# EAGLE board Proto_shield_REV3 (EAGLE 7.4.0)
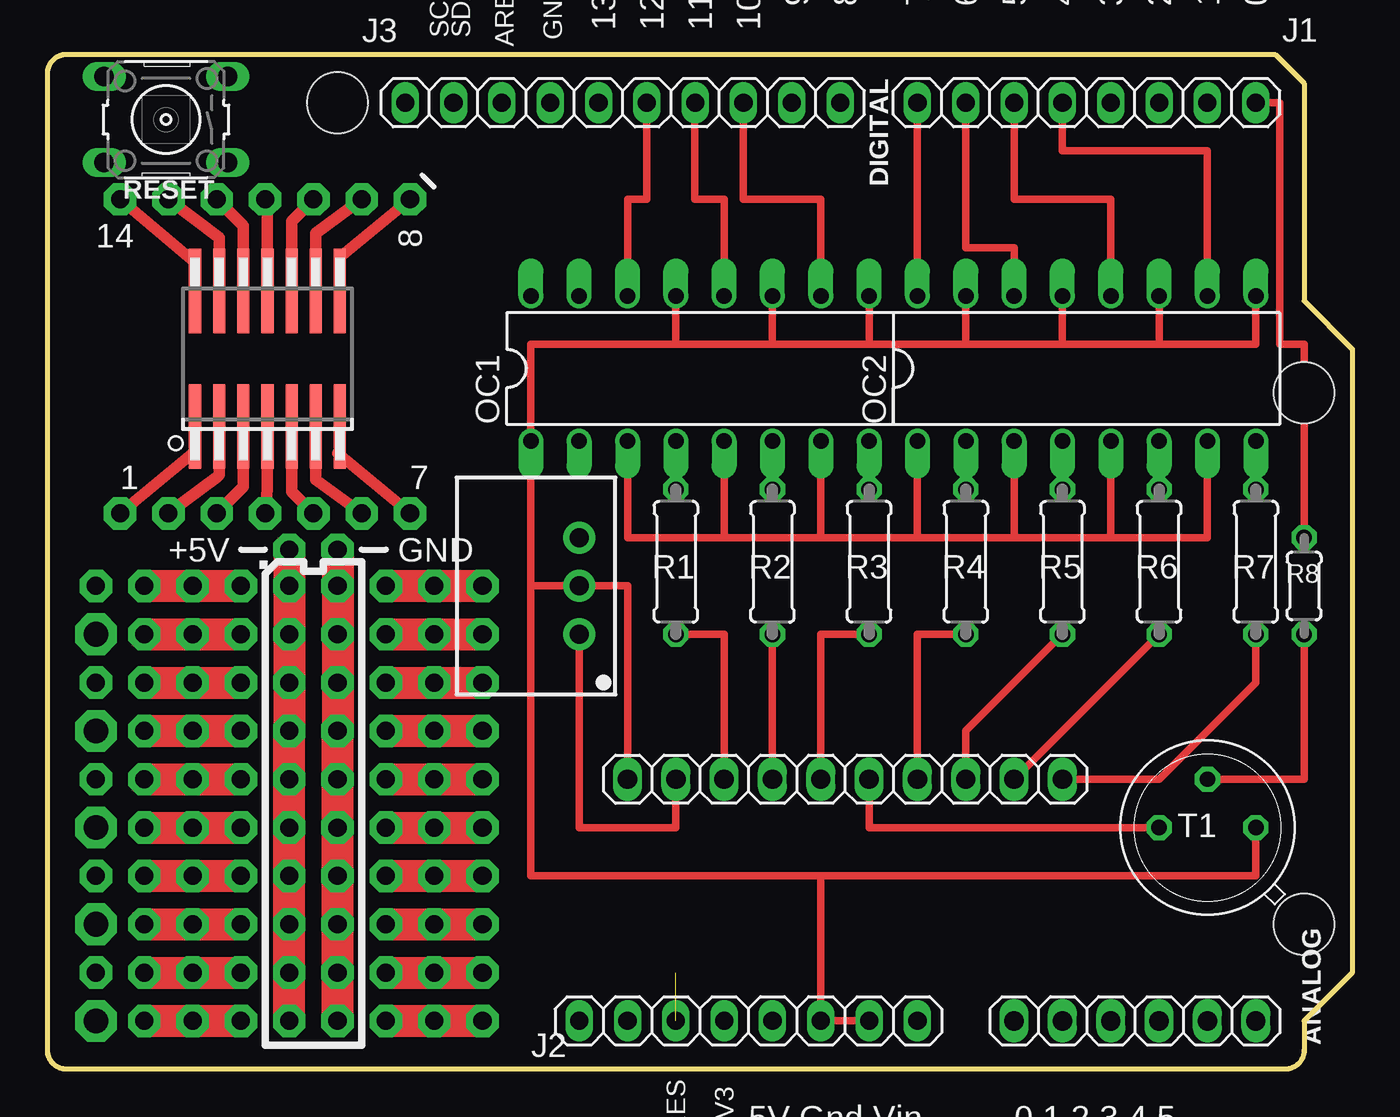
[diagram p0: board, top side]
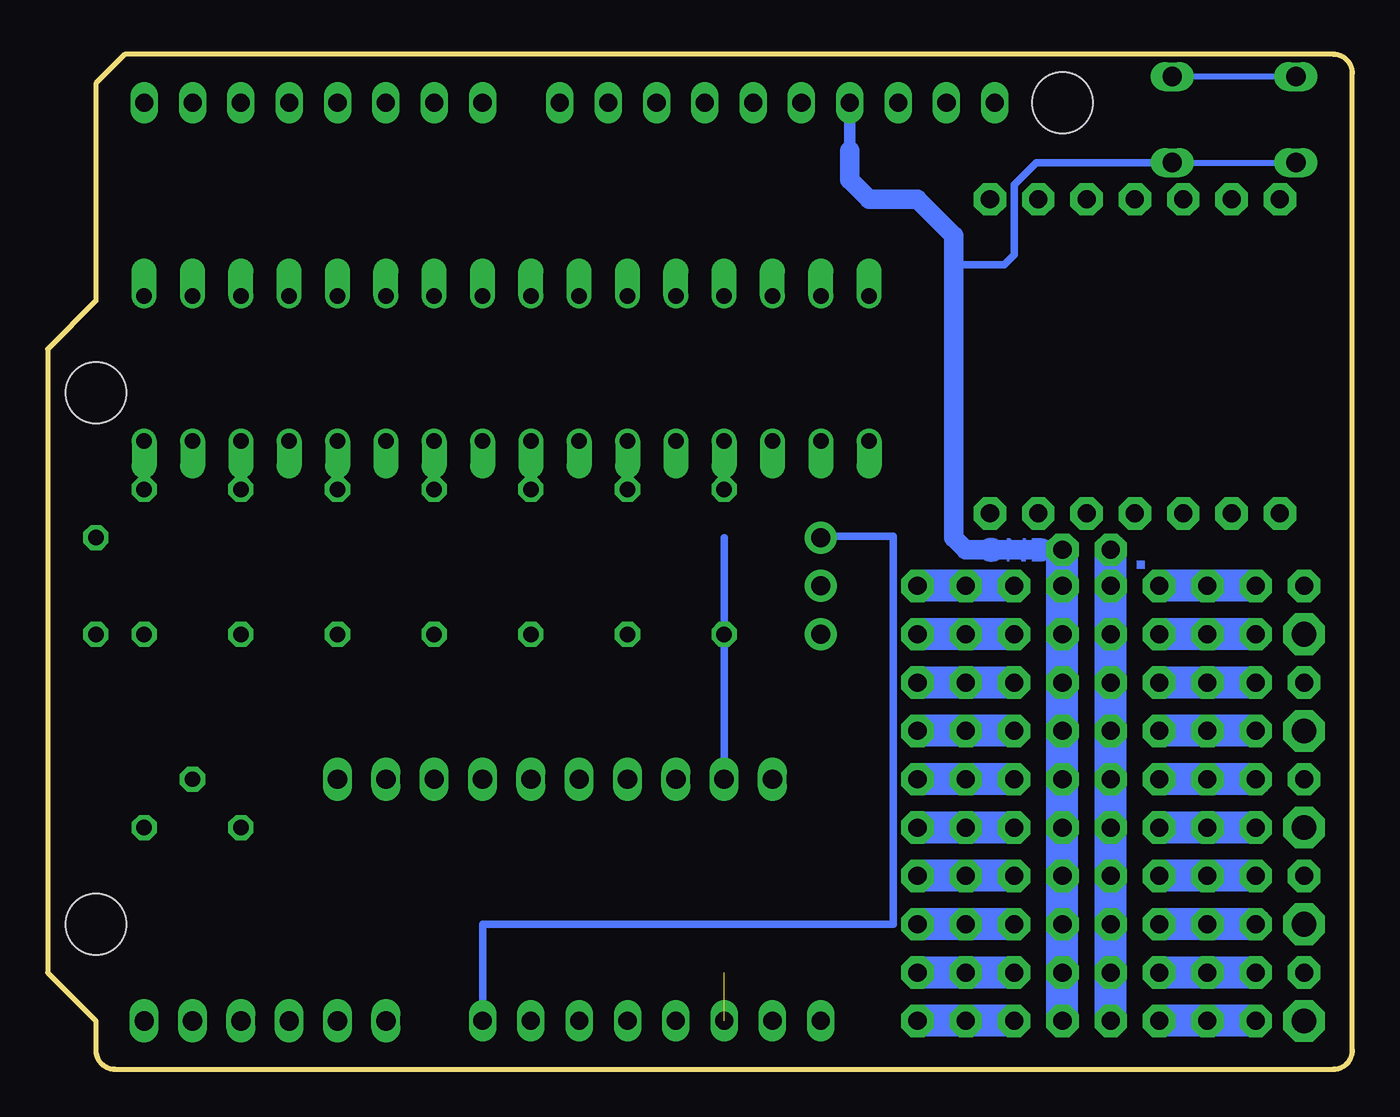
[diagram p1: board, bottom side, seen from below]

Size 68.58 x 53.34 mm. Coordinates in mm from the lower left corner, seen from the top.
Outline: 64.52,53.34 66.04,51.82 66.04,40.39 68.58,37.85 68.58,5.08 66.04,2.54 66.04,1 arc-90 65.04,0 1,0 arc-90 0,1 0,52.34 arc-90 1,53.34 64.52,53.34
Copper layers (1*16): Top 0.035mm / dielectric 1.5mm / Bottom 0.035mm
Design rules "default": minimum track width 10mil, minimum drill 24mil, track to track 8mil, track to pad 8mil, pad to pad 8mil, via to via 8mil, smd to smd 8mil, copper to edge 40mil, drill to drill 8mil, minimum pad ring 10mil, minimum via ring 8mil, stop-mask expansion 2mil, vias tented up to drill 0mil, thermal gap 10mil
Holes 3.2 mm at 15.24,50.8 66.04,7.62 66.04,35.56

## Footprints (pad centres in the part's own frame; a part is rotated, then mirrored left to right if it is on the bottom)
LSP10 = drill 0.95 pad 1.7 octagon: MP 0,0
SIP3 = drill 1 pad 1.676: 1 -2.54,0; 2 0,0; 3 2.54,0
1X06 = drill 1.016 long: 1 -6.35,0; 2 -3.81,0; 3 -1.27,0; 4 1.27,0; 5 3.81,0; 6 6.35,0
1X10 = drill 1.016 long: 1 -11.43,0; 2 -8.89,0; 3 -6.35,0; 4 -3.81,0; 5 -1.27,0; 6 1.27,0; 7 3.81,0; 8 6.35,0; 9 8.89,0; 10 11.43,0
SO-14NMW = smd 0.635 x 4.445: P$1 -3.048,-3.683; P$2 -1.778,-3.683; P$3 -0.508,-3.683; P$4 0.762,-3.683; P$5 2.032,-3.683; P$6 3.302,-3.683; P$7 4.572,-3.683; P$8 4.572,3.429; P$9 3.302,3.429; P$10 2.032,3.429; P$11 0.762,3.429; P$12 -0.508,3.429; P$13 -1.778,3.429; P$14 -3.048,3.429
1X08-TH = drill 0.95 pad 1.422 long: 1 -8.89,0; 2 -6.35,0; 3 -3.81,0; 4 -1.27,0; 5 1.27,0; 6 3.81,0; 7 6.35,0; 8 8.89,0
1X10-TH = drill 0.95 pad 1.422 long: 1 -11.43,0; 2 -8.89,0; 3 -6.35,0; 4 -3.81,0; 5 -1.27,0; 6 1.27,0; 7 3.81,0; 8 6.35,0; 9 8.89,0; 10 11.43,0
DIL16 = drill 0.813 offset: 1 -8.89,-3.81; 2 -6.35,-3.81; 3 -3.81,-3.81; 4 -1.27,-3.81; 5 1.27,-3.81; 6 3.81,-3.81; 7 6.35,-3.81; 8 8.89,-3.81; 9 8.89,3.81; 10 6.35,3.81; 11 3.81,3.81; 12 1.27,3.81; 13 -1.27,3.81; 14 -3.81,3.81; 15 -6.35,3.81; 16 -8.89,3.81
0207/7 = drill 0.813 octagon: 1 -3.81,0; 2 3.81,0
0204/5 = drill 0.813 octagon: 1 -2.54,0; 2 2.54,0
B3F-10XX = drill 1.016 long: 1 -3.251,2.261; 2 3.251,2.261; 3 -3.251,-2.261; 4 3.251,-2.261
TO5 = drill 0.813 octagon: 1 0,-2.54; 2 2.54,0; 3 0,2.54

## Placement (x,y rotation side)
1  LSP10  [LSP10]  3.81,29.21 90 top
2  LSP10  [LSP10]  6.35,29.21 90 top
3  LSP10  [LSP10]  8.89,29.21 90 top
4  LSP10  [LSP10]  11.43,29.21 90 top
5  LSP10  [LSP10]  13.97,29.21 90 top
6  LSP10  [LSP10]  16.51,29.21 90 top
7  LSP10  [LSP10]  19.05,29.21 90 top
8  LSP10  [LSP10]  19.05,45.72 90 top
9  LSP10  [LSP10]  16.51,45.72 90 top
10  LSP10  [LSP10]  13.97,45.72 90 top
11  LSP10  [LSP10]  11.43,45.72 90 top
12  LSP10  [LSP10]  8.89,45.72 90 top
12V/5V  [SIP3]  27.94,25.4 90 top
13  LSP10  [LSP10]  6.35,45.72 270 top
14  LSP10  [LSP10]  3.81,45.72 270 top
ANALOG  [1X06]  57.15,2.54 0 top
E$13  [1X10]  41.91,15.24 0 top
IC2  SMD-14  [SO-14NMW]  10.79,37.47 0 top
J1  [1X08-TH]  54.61,50.8 180 top
J2  [1X08-TH]  36.83,2.54 0 top
J3  [1X10-TH]  30.23,50.8 180 top
OC1  [DIL16]  34.29,36.83 0 top
OC2  [DIL16]  54.61,36.83 0 top
R1  10K x 7  [0207/7]  33.02,26.67 90 top
R2  10K x 7  [0207/7]  38.1,26.67 90 top
R3  10K  [0207/7]  43.18,26.67 90 top
R4  10K  [0207/7]  48.26,26.67 90 top
R5  10K  [0207/7]  53.34,26.67 90 top
R6  10K  [0207/7]  58.42,26.67 90 top
R7  10K  [0207/7]  63.5,26.67 90 top
R8  [0204/5]  66.04,25.4 90 top
RESET  [B3F-10XX]  6.22,49.91 180 top
T1  [TO5]  60.96,12.7 90 top

## Library data of the parts
1-14 J1-J3 = SmartPrj
12V/5V = dc-dc-converter
ANALOG E$13 = pinhead
IC2 = carduino
OC1 OC2 = optocoupler
R1-R8 = rcl
RESET = switch-omron
T1 = transistor

## Nets
GND: 12V/5V.2 E$13.1 J2.7 OC1.9 OC1.11 OC1.13 OC2.9 OC2.11 OC2.13 OC2.15 T1.1
N$24: 14.MP IC2.P$14
N$97: 13.MP IC2.P$13
N$98: 12.MP IC2.P$12
N$99: 11.MP IC2.P$11
N$100: 10.MP IC2.P$10
N$101: 9.MP IC2.P$9
N$102: 8.MP IC2.P$8
N$103: 7.MP IC2.P$7
N$104: 6.MP IC2.P$6
N$109: 5.MP IC2.P$5
N$110: 3.MP IC2.P$3
N$111: 2.MP IC2.P$2
N$112: 1.MP IC2.P$1
N$113: 4.MP IC2.P$4
S$1: OC1.14
S$2: OC2.8 R7.2
S$3: OC1.4 R1.2
S$4: OC1.6 R2.2
S$5: OC1.8 R3.2
S$6: OC2.2 R4.2
S$7: OC2.4 R5.2
S$8: OC2.6 R6.2
S$9: OC1.3 OC1.5 OC1.7 OC2.1 OC2.3 OC2.5 OC2.7
S$10: E$13.6 T1.3
S$11: J3.7 RESET.1 RESET.2
S$12: E$13.3 R1.1
S$13: E$13.10 R7.1
S$14: RESET.3 RESET.4
S$15: 12V/5V.1 E$13.2
S$16: E$13.4 R2.1
S$17: E$13.5 R3.1
S$18: J2.8
S$19: J1.1 R8.2
S$20: R8.1 T1.2
S$22: OC1.10
S$23: J1.8 OC2.16
S$24: J1.7 OC2.14
S$25: E$13.7 R4.1
S$26: E$13.8 R5.1
S$27: E$13.9 R6.1
S$29: J1.6 OC2.12
S$30: J1.5 OC2.10

## Tracks (layer width: path | path; a pad name or v marks a point on that pad's centre or on a via)
+5V  (via drill 0.95 pad 1.7)
  Top 1.676: v12.7,2.54 v12.7,5.08 v12.7,7.62 v12.7,10.16 v12.7,12.7 v12.7,15.24 v12.7,17.78 v12.7,20.32 v12.7,22.86 v12.7,25.4 v12.7,27.3
  Bottom 1.676: v12.7,2.54 v12.7,27.3
GND
  Top 0.406: E$13.1 30.48,25.4 12V/5V.2 25.4,25.4 | T1.1 63.5,10.16 40.64,10.16 | 25.4,25.4 25.4,38.1 33.02,38.1 | OC1.13 33.02,38.1 | 33.02,38.1 38.1,38.1 | OC1.11 38.1,38.1 | 38.1,38.1 43.18,38.1 | OC1.9 43.18,38.1 | 43.18,38.1 48.26,38.1 | OC2.15 48.26,38.1 | 48.26,38.1 53.34,38.1 | OC2.13 53.34,38.1 | 53.34,38.1 58.42,38.1 | 58.42,38.1 OC2.11 | 58.42,38.1 63.5,38.1 OC2.9 | 40.64,10.16 25.4,10.16 25.4,25.4 | 40.64,10.16 40.64,2.54 J2.7
N$24
  Top 0.61: IC2.P$14 7.75,42.42 14.MP
N$27  (via drill 0.95 pad 1.7)
  Top 1.676: v17.78,5.08 v22.86,5.08
N$28  (via drill 0.95 pad 1.7)
  other vias: 20.32,5.08
N$29  (via drill 1.3 pad 2.18)
  other vias: 2.54,17.78
N$30  (via drill 0.95 pad 1.7)
  other vias: 2.54,25.4
N$33  (via drill 0.95 pad 1.7)
  other vias: 7.62,5.08
N$34  (via drill 0.95 pad 1.7)
  Top 1.676: v5.08,5.08 v10.16,5.08
N$35  (via drill 1.3 pad 2.18)
  other vias: 2.54,22.86
N$36  (via drill 0.95 pad 1.7)
  other vias: 20.32,7.62
N$37  (via drill 0.95 pad 1.7)
  Top 1.676: v17.78,7.62 v22.86,7.62
N$40  (via drill 0.95 pad 1.7)
  other vias: 2.54,5.08
N$41  (via drill 0.95 pad 1.7)
  Top 1.676: v5.08,7.62 v10.16,7.62
N$42  (via drill 0.95 pad 1.7)
  other vias: 7.62,7.62
N$44  (via drill 1.3 pad 2.18)
  other vias: 2.54,7.62
N$48  (via drill 0.95 pad 1.7)
  Top 1.676: v17.78,10.16 v22.86,10.16
N$49  (via drill 0.95 pad 1.7)
  other vias: 20.32,10.16
N$54  (via drill 0.95 pad 1.7)
  other vias: 7.62,10.16
N$55  (via drill 0.95 pad 1.7)
  Top 1.676: v5.08,10.16 v10.16,10.16
N$56  (via drill 0.95 pad 1.7)
  other vias: 2.54,10.16
N$60
  Bottom 1.676: 17.78,5.08 22.86,5.08
N$61  (via drill 0.95 pad 1.7)
  other vias: 20.32,12.7
N$62  (via drill 0.95 pad 1.7)
  Top 1.676: v17.78,12.7 v22.86,12.7
N$65  (via drill 0.95 pad 1.7)
  Top 1.676: v5.08,12.7 v10.16,12.7
N$66  (via drill 0.95 pad 1.7)
  other vias: 7.62,12.7
N$67  (via drill 0.95 pad 1.7)
  Top 1.676: v5.08,22.86 v10.16,22.86
N$68  (via drill 1.3 pad 2.18)
  other vias: 2.54,12.7
N$72  (via drill 0.95 pad 1.7)
  Top 1.676: v17.78,15.24 v22.86,15.24
N$73  (via drill 0.95 pad 1.7)
  other vias: 20.32,15.24
N$74  (via drill 0.95 pad 1.7)
  other vias: 7.62,22.86
N$75  (via drill 0.95 pad 1.7)
  other vias: 7.62,20.32
N$76  (via drill 0.95 pad 1.7)
  Top 1.676: v22.86,22.86 v20.32,22.86 v17.78,22.86
N$77  (via drill 0.95 pad 1.7)
  Top 1.676: v22.86,20.32 v20.32,20.32 v17.78,20.32
N$78  (via drill 0.95 pad 1.7)
  other vias: 7.62,15.24
N$79  (via drill 0.95 pad 1.7)
  Top 1.676: v5.08,15.24 v10.16,15.24
N$80  (via drill 0.95 pad 1.7)
  other vias: 2.54,15.24
N$84  (via drill 0.95 pad 1.7)
  Top 1.676: v5.08,17.78 v10.16,17.78
N$85  (via drill 0.95 pad 1.7)
  other vias: 20.32,17.78
N$86  (via drill 0.95 pad 1.7)
  Top 1.676: v17.78,17.78 v22.86,17.78
N$87  (via drill 0.95 pad 1.7)
  Top 1.676: v5.08,20.32 v10.16,20.32
N$90  (via drill 0.95 pad 1.7)
  other vias: 7.62,17.78
N$92  (via drill 0.95 pad 1.7)
  other vias: 2.54,20.32
N$97
  Top 0.61: IC2.P$13 9.02,43.69 13.MP
N$98
  Top 0.61: IC2.P$12 10.29,44.32 12.MP
N$99
  Top 0.61: IC2.P$11 11.56,46.23 11.MP
N$100
  Top 0.61: IC2.P$10 12.83,44.58 10.MP
N$101
  Top 0.61: IC2.P$9 14.1,43.94 9.MP
N$102
  Top 0.61: IC2.P$8 15.37,42.67 8.MP
N$103
  Top 0.61: 7.MP 15.24,32.38 15.37,32.51 IC2.P$7
N$104
  Top 0.61: IC2.P$6 14.1,30.99 6.MP
N$109
  Top 0.61: IC2.P$5 12.83,30.35 5.MP
N$110
  Top 0.61: IC2.P$3 10.29,30.61 3.MP
N$111
  Top 0.61: 2.MP 8.89,31.11 9.02,31.24 IC2.P$2
N$112
  Top 0.61: 1.MP 7.62,32.38 7.75,32.51 IC2.P$1
N$113
  Top 0.61: IC2.P$4 11.56,30.48 4.MP
N$114
  Bottom 1.676: 5.08,25.4 10.16,25.4
N$115
  Bottom 1.676: 17.78,25.4 22.86,25.4
N$116
  Bottom 1.676: 17.78,22.86 22.86,22.86
N$118  (via drill 0.95 pad 1.7)
  Top 1.676: v22.86,25.4 v20.32,25.4 v17.78,25.4
N$121
  Bottom 1.676: 17.78,20.32 22.86,20.32
N$122
  Bottom 1.676: 17.78,17.78 22.86,17.78
N$124
  Bottom 1.676: 17.78,15.24 22.86,15.24
N$125
  Bottom 1.676: 17.78,12.7 22.86,12.7
N$126
  Bottom 1.676: 17.78,10.16 22.86,10.16
N$127
  Bottom 1.676: 5.08,5.08 10.16,5.08
N$128
  Bottom 1.676: 5.08,10.16 10.16,10.16
N$129
  Bottom 1.676: 5.08,12.7 10.16,12.7
N$130
  Bottom 1.676: 5.08,15.24 10.16,15.24
N$133
  Bottom 1.676: 5.08,17.78 10.16,17.78
N$134
  Bottom 1.676: 5.08,20.32 10.16,20.32
N$136
  Bottom 1.676: 5.08,22.86 10.16,22.86
N$137
  Bottom 1.676: 5.08,7.62 10.16,7.62
N$138
  Bottom 1.676: 5.08,2.54 10.16,2.54
N$139
  Bottom 1.676: 17.78,7.62 22.86,7.62
N$140
  Bottom 1.676: 17.78,2.54 22.86,2.54
N$178  (via drill 0.95 pad 1.7)
  Top 1.676: v5.08,25.4 v10.16,25.4
N$190  (via drill 0.95 pad 1.7)
  other vias: 7.62,25.4
N$329  (via drill 1.3 pad 2.18)
  other vias: 2.54,2.54
N$331  (via drill 0.95 pad 1.7)
  other vias: 7.62,2.54
N$332  (via drill 0.95 pad 1.7)
  Top 1.676: v5.08,2.54 v10.16,2.54
N$335  (via drill 0.95 pad 1.7)
  Top 1.676: v17.78,2.54 v22.86,2.54
N$336  (via drill 0.95 pad 1.7)
  other vias: 20.32,2.54
S$1
  Top 0.406: OC1.14 30.48,45.72 31.48,45.72 31.48,50.81
S$2
  Top 0.406: R7.2 OC2.8
S$3
  Top 0.406: R1.2 OC1.4
S$4
  Top 0.406: R2.2 OC1.6
S$5
  Top 0.406: R3.2 OC1.8
S$6
  Top 0.406: R4.2 OC2.2
S$7
  Top 0.406: R5.2 OC2.4
S$8
  Top 0.406: R6.2 OC2.6
S$9
  Top 0.406: OC2.7 60.96,27.94 55.88,27.94 | OC1.3 30.48,27.94 35.56,27.94 | 35.56,27.94 OC1.5 | 35.56,27.94 40.64,27.94 | 40.64,27.94 OC1.7 | 40.64,27.94 45.72,27.94 | 45.72,27.94 OC2.1 | 45.72,27.94 50.8,27.94 | 50.8,27.94 OC2.3 | 50.8,27.94 55.88,27.94 | 55.88,27.94 OC2.5
S$10
  Top 0.406: T1.3 43.18,12.7 E$13.6
S$11  (via drill 0.95 pad 1.7)
  Top 1.676: v15.24,27.3 v15.24,25.4 v15.24,22.86 v15.24,20.32 v15.24,17.78 v15.24,15.24 v15.24,12.7 v15.24,10.16 v15.24,7.62 v15.24,5.08 v15.24,2.54
  Bottom 0.305: RESET.1 RESET.2
  Bottom 0.406: RESET.1 16.61,47.65 17.78,46.48 17.78,42.8 18.29,42.29 20.95,42.29
  Bottom 0.61: 26.42,48.26 J3.7
  Bottom 1.016: 26.42,48.26 26.42,46.74 25.4,45.72 22.86,45.72 20.95,43.81 20.95,42.29 20.95,27.94 20.32,27.3 v15.24,27.3
  Bottom 1.676: v15.24,2.54 v15.24,27.3
S$12
  Top 0.406: E$13.3 35.56,22.86 R1.1
S$13
  Top 0.406: R7.1 63.5,20.32 58.42,15.24 E$13.10
S$14
  Bottom 0.305: RESET.4 RESET.3
S$15
  Top 0.406: E$13.2 33.02,12.7 27.94,12.7 12V/5V.1
  Bottom 0.406: E$13.2 33.02,27.94
S$16
  Top 0.406: R2.1 E$13.4
S$17
  Top 0.406: R3.1 40.64,22.86 E$13.5
S$18
  Bottom 0.406: 27.2,28 24.13,28 24.13,7.62 45.72,7.62 J2.8
S$19
  Top 0.406: J1.1 64.77,50.8 64.77,38.1 66.04,38.1 R8.2
S$20
  Top 0.406: R8.1 66.04,15.24 64.77,15.24 63.5,15.24 T1.2
S$21
  Top 0.406: 35.62,40.78 35.56,40.78 35.56,45.72 34.01,45.72 34.01,50.79
S$22
  Top 0.406: OC1.10 40.64,45.72 36.57,45.72 36.57,50.8
S$23
  Top 0.406: OC2.16 J1.8
S$24
  Top 0.406: OC2.14 50.8,43.18 48.26,43.18 J1.7
S$25
  Top 0.406: R4.1 45.72,22.86 E$13.7
S$26
  Top 0.406: R5.1 48.26,17.78 E$13.8
S$27
  Top 0.406: R6.1 E$13.9
S$28  (1 unrouted)
S$29
  Top 0.406: OC2.12 55.88,45.72 50.8,45.72 J1.6
S$30
  Top 0.406: OC2.10 60.96,48.26 53.34,48.26 J1.5

## Text on the board
Bottom: GND | .
tPlace: 9 | 8 | 7 | 6 | 5 | 4 | 3 | 2 | 1 | 0 | 13 | 12 | 11 | 10 | +5V | GND | .
bOrigins: GND | 12V | S1 | S2 | S3 | RELE' | S4 | S5 | S6 | S7
tNames: AREF | SCL | SDA | GND | DIGITAL | RES | 3V3 | 5V Gnd Vin | 0 1 2 3 4 5
bStop: .
Reference: USB | ETH